# Altium PCB 3PDT.PcbDoc
Units mil, origin at the board's own origin, x right, y up, seen from the top; angles counter-clockwise.
Board outline 1899.61 x 1751.97 mil, 2 copper layers (Top Layer, Bottom Layer); 10 components, 9 nets, 40 pads, 0 vias.
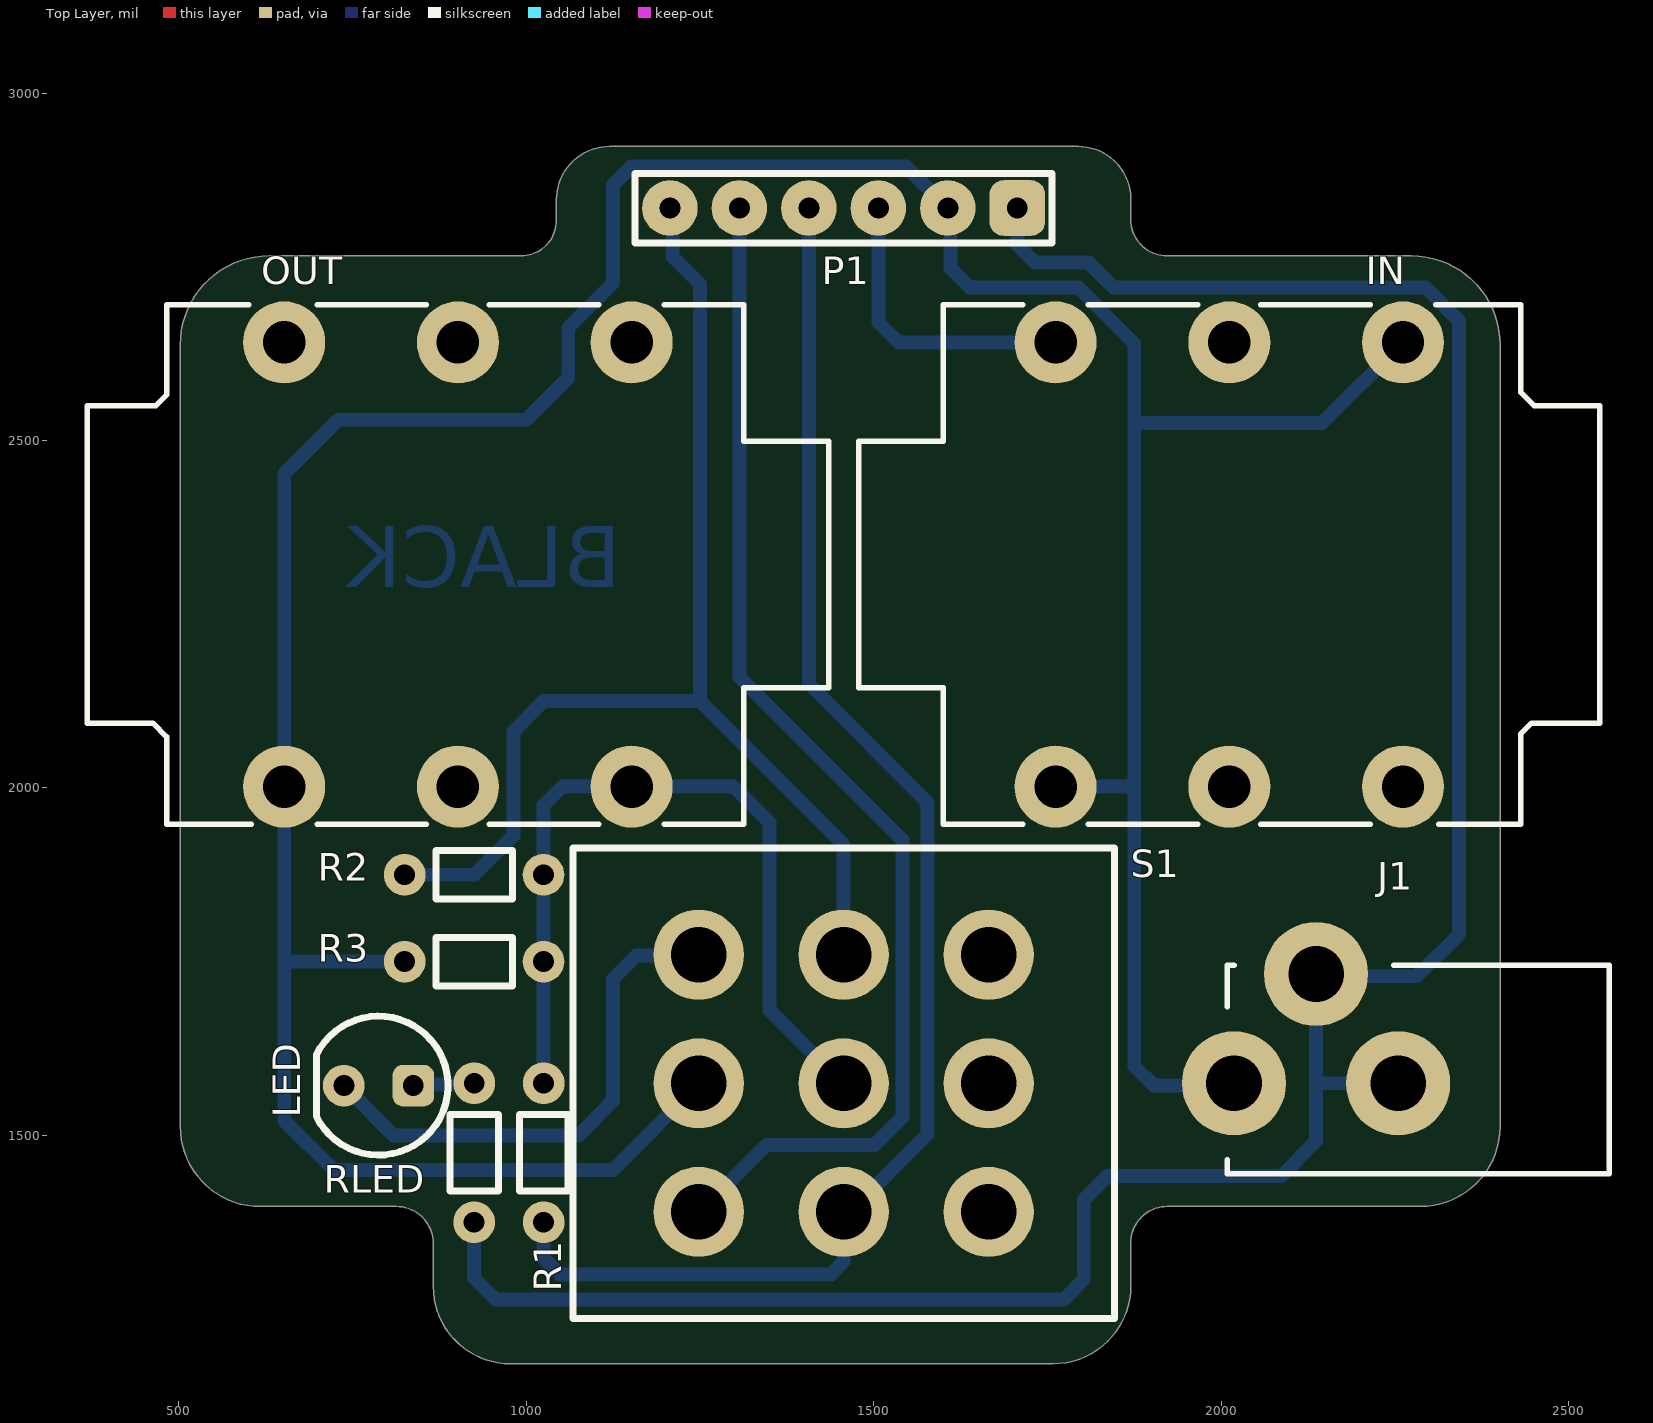
[diagram p0: Top Layer view]
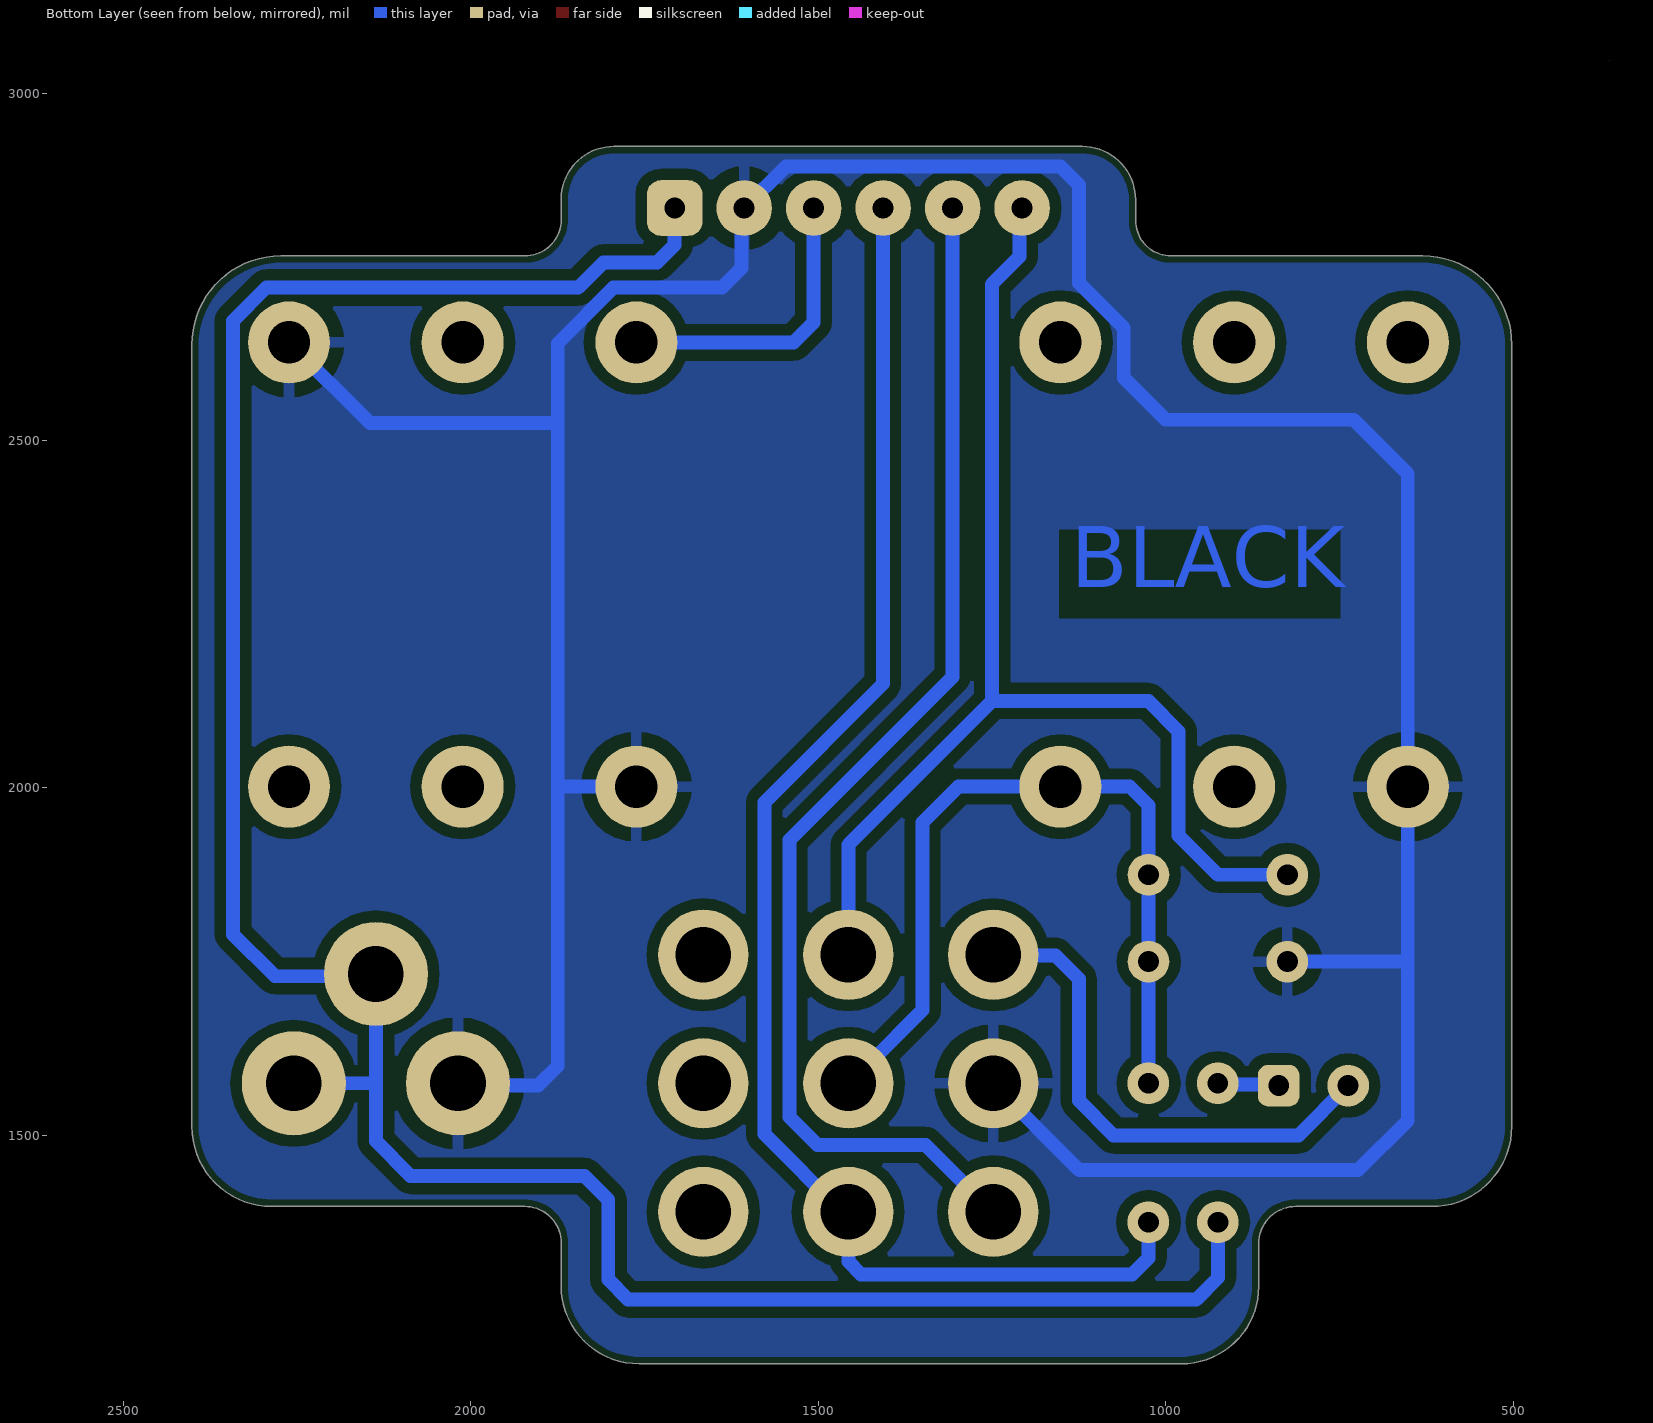
[diagram p1: Bottom Layer view, seen from below]

## Layer stack, top to bottom
Top Solder: solder mask 1, SM-003, Dk 4
Top Layer: signal copper 1.4
Dielectric 1: dielectric 12.6, FR-4, Dk 4.8
Bottom Layer: signal copper 1.4
Bottom Solder: solder mask 1, SM-003, Dk 4

## Board outline
617.12,1397.64 813,1397.64 cw(c813,1344.5) 866.14,1344.48 866.14,1282.48 ccw(c977.36,1282.47) 977.36,1171.26 1757.87,1171.26 ccw(c1757.87,1283.46) 1870.08,1283.46 1870.08,1345.47 cw(c1922.24,1345.47) 1922.24,1397.64 2286.42,1397.64 ccw(c2286.42,1512.8) 2401.57,1512.8 2401.57,2637.8 ccw(c2273.63,2637.8) 2273.62,2765.75 1922.24,2765.75 cw(c1922.24,2817.91) 1870.08,2817.91 1870.08,2847.44 ccw(c1794.3,2847.45) 1794.29,2923.23 1120.08,2923.23 ccw(c1120.06,2846.47) 1043.31,2846.46 1043.31,2816.93 cw(c992.15,2816.91) 992.13,2765.75 629.92,2765.75 ccw(c629.89,2637.82) 501.97,2637.79 501.97,1512.8 ccw(c617.12,1512.79)
cut-out: 150,1002.88

## Design rules (kind name [scope] priority, off if disabled: settings)
BoardOutlineClearance [All] p1: gap=10 ignorepadtopadclearanceinfootprint=FALSE
Clearance "Polygon Clearance" [InPolygon] p1: gap=16 ignorepadtopadclearanceinfootprint=FALSE
Clearance [All] p2: gap=16 ignorepadtopadclearanceinfootprint=FALSE except(10: Arc-THPad Track-THPad)
ComponentClearance [All] p1: gap=10 collisioncheckmode=3 verticalgap=-3149.61 showdistances=FALSE
Height [All] p1: minheight=0 maxheight=2000 prefheight=500
HoleSize [All] p1: absolutevalues=TRUE maxlimit=100 minlimit=16 maxpercent=80.000 minpercent=20.000
PlaneClearance PlaneClearance_1 [InNet('No Net') And OnLayer('Mechanical 1')] p1: clearance=20
PlaneClearance [All] p2: clearance=20
PlaneConnect [All] p1: planeconnectstyle=Relief reliefexpansion=20 reliefentries=4 reliefconductorwidth=16 reliefairgap=20
PolygonConnect [InNet('GND')] p1: connectstyle=Relief reliefconductorwidth=16 reliefentries=4 polygonreliefangle="90 Angle" airgapwidth=20
RoomDefinition 3PDT [InComponentClass('3PDT')] p1: confinementstyle=ConfineIn formatcopy=TRUE lockcomponents=FALSE outline 0,3021.57 0,1121.57 2992.13,1121.57 2992.13,3021.57
RoutingVias [All] p1: holewidth=30 width=60 viastyle="Through Hole" minholewidth=28 minwidth=50 maxholewidth=40 maxwidth=80
SolderMaskExpansion [All] p1: expansion=4
Width [All] p1: maxlimit=30 minlimit=16 preferedwidth=20
25 further rules are at their usual default settings.

## Components (designator, comment, footprint, x,y, rotation, side; value= is the part's Value field where it differs from the comment)
IN "Jack stereo c/switch" NMJ6HCD2 2419.29,2321.57 r90 top locked value=NMJ6HCD2
J1 "PWR" "Power Connector Round Pads" 2018.58,1574.8 r0 top locked
LED "LED1" LED 787.4,1571.57 r180 top locked
OUT "Jack stereo c/switch" NMJ6HCD2 494.09,2321.57 r270 top locked value=NMJ6HCD2
P1 "Header 6" "Header 6" 1706.69,2834.65 r180 top locked
R1 "Res1" "Res 0.2" 1025,1575 r270 top value=68k
R2 "Res1" "Res 0.2" 1024.88,1875 r180 top value=68k
R3 "Res1" "Res 0.2" 824.88,1750.06 r0 top value=100K
RLED "Res1" "Res 0.2" 925,1575 r270 top value=1K
S1 "3PDT Footswitch" "3PDT FOOTSWITCH" 1456.69,1574.8 r0 top locked

## Footprints (in the part's own frame and the unit in brackets; to place one, negate y for a bottom-side part, rotate by r counter-clockwise, add the part's x,y. Pads: shape width x height; smd on the part's side, far side on the other; paste and mask are expansions set on the pad)
"3PDT FOOTSWITCH" [mil]
  round 130 hole 80: 1a(-208.66,185.04) 1b(0,185.04) 1c(208.66,185.04) 2a(-208.66,0) 2b(0,0) 2c(208.66,0) 3a(-208.66,-185.04) 3b(0,-185.04) 3c(208.66,-185.04)
  silkscreen extent -390,-339 390,339, body extent -390,-340 390,340, height 1496
"Header 6" [mil]
  rrect50% 80x80 hole 30: 1(0,0)
  round 80 hole 30: 2(100,0) 3(200,0) 4(300,0) 5(400,0) 6(500,0)
  silkscreen extent -50,-50 550,50, body extent -50,-50 550,50, height 400
LED [mil]
  rrect50% 60x60 hole 30: 1(-50,0)
  round 60 hole 30: 2(50,0)
  silkscreen extent -100,-100 89,100, body extent -70,-70 70,70, height 1158
NMJ6HCD2 [mm] "Jack 1/4\" stereo"
  round 3 hole 1.55: 1(8.12,4) 2(-8.12,4) 3(8.12,10.35) 4(-8.12,10.35) 5(8.12,16.7) 6(-8.12,16.7)
  silkscreen extent -9.5,-3.2 9.5,23.9, body extent -9.1,-8.29 9.1,23.5, height 15.96
"Power Connector Round Pads" [mil]
  round 150 hole 80: 1(0,0) 2(236.22,0) 3(118.11,157.48)
  silkscreen extent -10,-130 540,170, body extent -10,-197 541,167, height 394
"Res 0.2" [mil]
  round 60 hole 30: 1(0,0) 2(200,-0.06)
  silkscreen extent 45,-35 155,35, body extent -10,-25 210,25, height 55

## Part data
IN OUT: library part NMJ6HCD2, "Jack 1/4\" Stereo Switched", Package=PTH, MF=Neutrik, MF PN=NMJ6HCD2, PN=000000
J1: library part "Power Connector"
LED: "Typical RED GaAs LED", LatestRevisionDate=08-Jul-2005, LatestRevisionNote="Mech Layer 1 removed.", PackageDescription="LED; 2 Leads", PackageReference=LED-1, Published=8-Jun-2000, Publisher="Altium Limited"
P1: "Header, 6-Pin", LatestRevisionDate=17-Jul-2002, LatestRevisionNote="Re-released for DXP Platform.", Publisher="Altium Limited"
R1 R2 R3 RLED: "Resistor", LatestRevisionDate=17-Jul-2002, LatestRevisionNote="Re-released for DXP Platform.", PackageDescription="Axial Device, Thru-Hole; 2 Leads; 0.3 in Pin Spacing", PackageReference=AXIAL-0.3, Published=8-Jun-2000, Publisher="Altium Limited"

## Nets (pads, with @x,y where several pads share a name; then routed paths per layer and width w, separated by ;. In a path a pad name is that pad's centre, name@x,y a point inside that pad or via, vN(x,y) a via of type N, cw(c..) or ccw(c..) an arc to the next point about the centre after c; other vN are vias at no path point)
9V: J1.2 J1.3 P1.1 RLED.2 | length 3671.1
  Bottom Layer w20: RLED.2 924.94,1295.06 956,1264 1774,1264 1802.27,1292.27 1802.27,1407.27 1836.69,1441.69 2086.69,1441.69 2136.69,1491.69 2136.69,1575 ; P1.1 1706.69,2781.5 1731.88,2756.31 1809.47,2756.31 1845.47,2720.31 2294.56,2720.31 2342.52,2672.35 2342.52,1789.37 2282.2,1729.05 2136.69,1729.05 2136.69,1575 ; J1.2@2254.8,1571.57 2251.37,1575 2136.69,1575
GND: IN.1 IN.6 J1.1 OUT.1 P1.2 R3.1 S1.2a | length 5210.9
  Bottom Layer w20: R3.1 651.57,1750.06 ; S1.2a@1248.03,1573.55 1124.48,1450 723.15,1450 651.57,1521.57 651.57,1750.06 ; IN.6 1873.11,2001.89 1875,2000 ; J1.1@2018.58,1571.57 1903.43,1571.57 1875,1600 1875,2000 ; IN.1 2145.55,2525 1875,2525 ; 651.57,1750.06 OUT.1 651.57,2452.09 729.49,2530 1000.35,2530 1060.35,2590 1060.35,2661.84 1125,2726.48 1125,2868.07 1151.57,2894.65 1546.69,2894.65 P1.2 1610.35,2830.98 1610.35,2748.5 1638.54,2720.31 1794.56,2720.31 1875,2639.87 1875,2525 ; 1875,2000 1875,2525
GROUND_ON_CLEAN: P1.5 S1.3a | length 1756.2
  Bottom Layer w20: S1.3a@1248.03,1388.51 1345.75,1486.22 1501.22,1486.22 1541.69,1526.69 1541.69,1924.82 1306.69,2159.82 P1.5
INPUT: IN.5 P1.3 | length 431.7
  Bottom Layer w20: P1.3 1506.69,2670 1535.43,2641.26 IN.5
NetLED_1: LED.1 RLED.1 | length 89
  Bottom Layer w20: LED.1 839.11,1573.29 923.29,1573.29 RLED.1
NetLED_2: LED.2 S1.1a | length 749.9
  Bottom Layer w20: LED.2 808.98,1500 1075,1500 1125,1550 1125,1725 1158.59,1758.59 S1.1a@1248.03,1758.59
OUT: OUT.5 R1.1 R2.1 R3.2 S1.2b | length 1197
  Bottom Layer w20: R1.1 1025,1975.12 1051.77,2001.89 OUT.5 1298.23,2001.89 1350,1950.12 1350,1680.24 1425,1605.24 1425,1573.54 S1.2b@1456.69,1573.55
OUTPUT_CLEAN: P1.4 R1.2 S1.3b | length 2142.3
  Bottom Layer w20: R1.2 1025,1374.94 1025,1323.51 1048.51,1300 1438.28,1300 1456.69,1318.41 1456.69,1388.51 1464.42,1388.51 1577.69,1501.78 1577.69,1979 1406.69,2150 P1.4
OUTPUT_FX: P1.6 R2.2 S1.1b | length 1796.1
  Bottom Layer w20: R2.2 924.94,1875.06 981.34,1931.46 981.34,2081.34 1025,2125 1250,2125 ; P1.6 1210.35,2830.98 1210.35,2764.65 1250,2725 1250,2125 ; S1.1b@1456.69,1758.59 1456.69,1918.31 1250,2125
pads on no net: IN.2 IN.3 IN.4 OUT.2 OUT.3 OUT.4 OUT.6 S1.1c S1.2c S1.3c

## Polygon pours and split planes (outlines as drawn)
GND on Bottom Layer "GroundFill" (solid, pour order 18): 425,1150 450,1125 2475,1125 2525,1175 2525,3025 375,3025 375,1150

## Keep-outs
Bottom Layer:
  region: 361.69,3046.57

## Other copper
Bottom Layer:
  text "BLACK" at 1136.86,2260 h150

## Silkscreen, mask and mechanical layers (free items; w line width, h text height)
Mechanical 2:
  lines w8: 389.7,1377.95 ccw(c393.7,1377.95) 393.7,1373.95 cw(c393.7,1377.95) 389.7,1377.95 ; 389.7,2992.13 cw(c393.7,2992.13) 393.7,2996.13 ccw(c393.7,2992.13) 389.7,2992.13 ; 586.55,1141.73 ccw(c590.55,1141.73) 590.55,1137.73 cw(c590.55,1141.73) 586.55,1141.73 ; 2322.83,1137.73 ccw(c2322.83,1141.73) 2326.84,1141.73 cw(c2322.83,1141.73) 2322.83,1137.73 ; 2519.68,1373.95 ccw(c2519.68,1377.95) 2523.69,1377.95 cw(c2519.68,1377.95) 2519.68,1373.95 ; 2519.68,2996.13 cw(c2519.68,2992.13) 2523.69,2992.13 ccw(c2519.68,2992.13) 2519.68,2996.13
Mechanical 5 (Mech5):
  lines w8: 375,1137.73 500,1137.73 ; 389.7,1125 389.7,1175 ; 389.7,1377.95 389.7,2992.13 ; 393.7,1373.95 586.55,1373.95 586.55,1141.73 ; 393.7,2996.13 2519.68,2996.13 ; 590.55,1137.73 2322.83,1137.73 ; 2326.84,1141.73 2326.84,1373.95 2519.68,1373.95 ; 2413.39,1137.73 2538.39,1137.73 ; 2523.69,1125 2523.69,1175 ; 2523.69,1377.95 2523.69,2992.13